# Altium PCB Setback.PcbDoc
Units mil, origin at the board's own origin, x right, y up, seen from the top; angles counter-clockwise.
Board outline 2244.09 x 944.88 mil, 2 copper layers (Top Layer, Bottom Layer), stack 65.792 mil thick; 6 components, 5 nets, 18 pads, 0 vias.
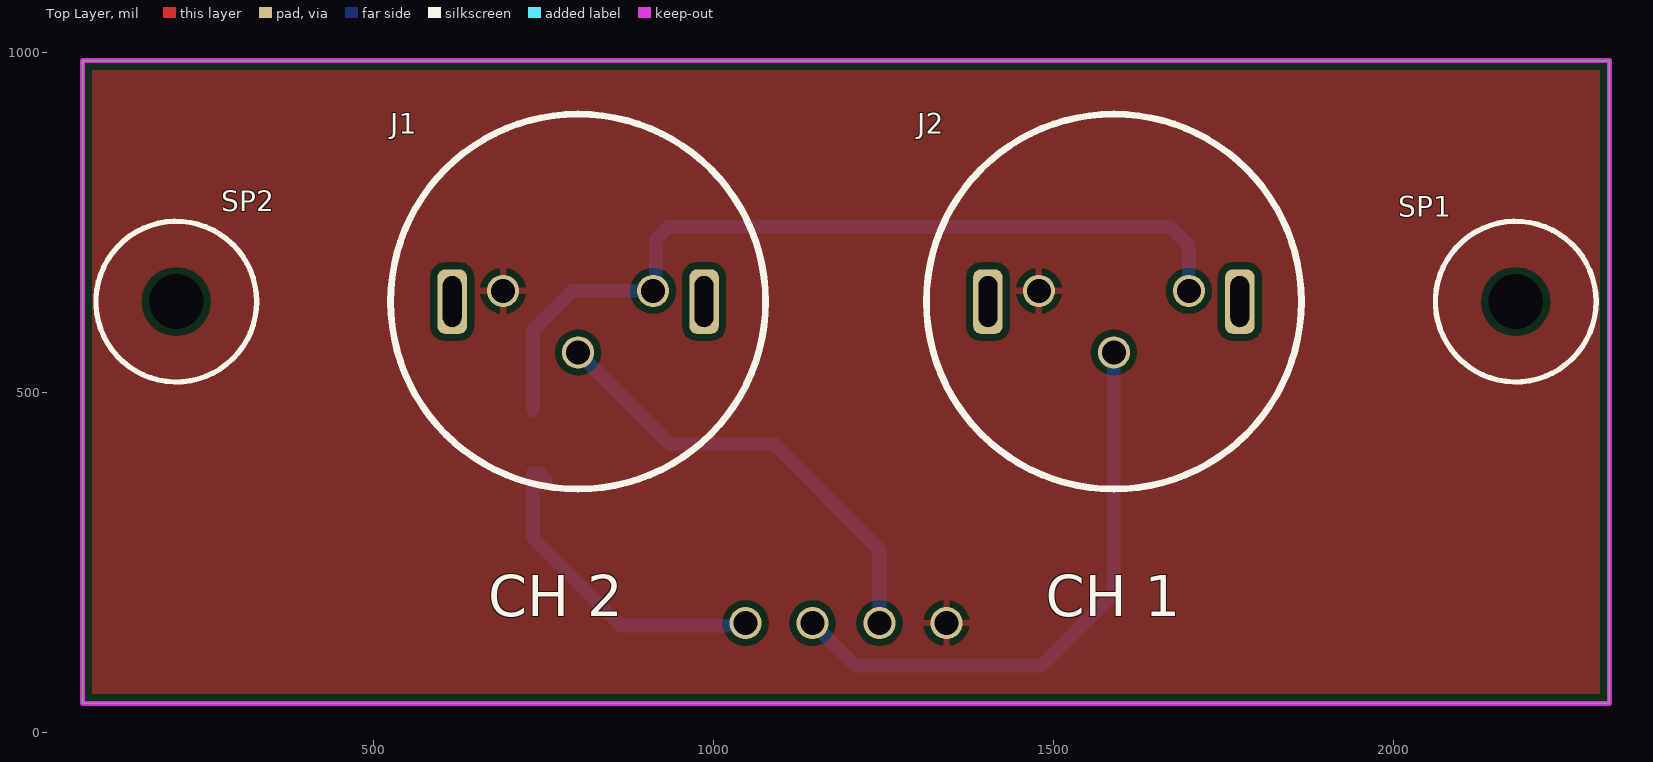
[diagram p0: Top Layer view]
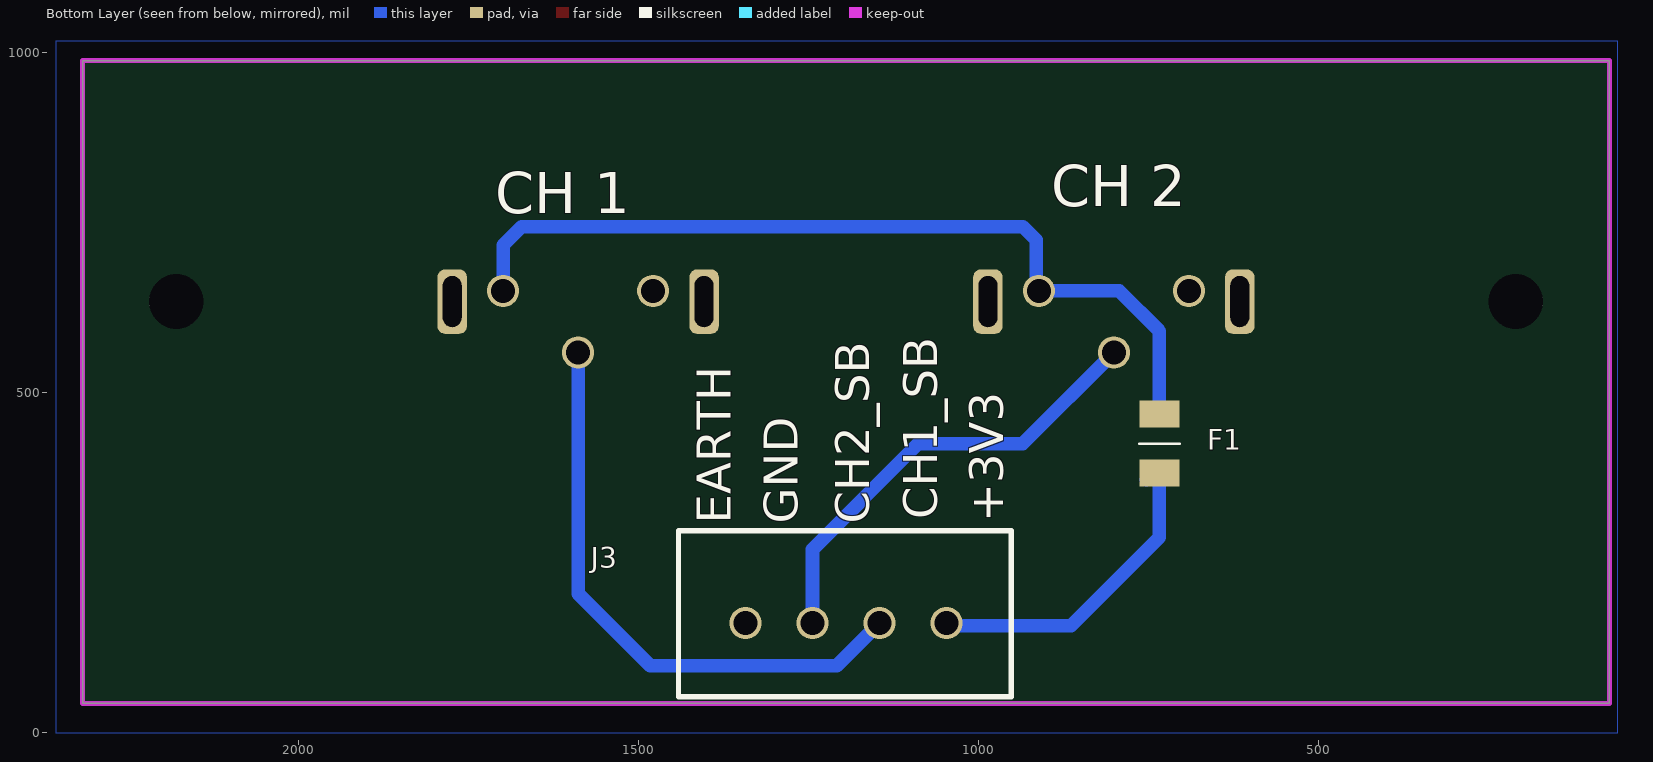
[diagram p1: Bottom Layer view, seen from below]

## Layer stack, top to bottom
Top Solder: solder mask 0.4, Solder Resist, Dk 3.5
Top Layer: signal copper 1.4
Dielectric 1: dielectric 62.9921, FR-4, Dk 4.8
Bottom Layer: signal copper 1.4
Bottom Solder: solder mask 0.4, Solder Resist, Dk 3.5

## Board outline
72.83,43.31 72.83,988.19 2316.93,988.19 2316.93,43.31

## Design rules (kind name [scope] priority, off if disabled: settings)
Clearance [All] p1: gap=10 ignorepadtopadclearanceinfootprint=FALSE except(0: Arc-Hole Track-Hole SMDPad-Hole THPad-Hole Via-Hole Fill-Hole Poly-Hole Region-Hole Text-Hole)
HoleSize [All] p1: absolutevalues=TRUE maxlimit=157.48 minlimit=1 maxpercent=80.000 minpercent=20.000
PolygonConnect [All] p1: connectstyle=Relief reliefconductorwidth=10 reliefentries=4 polygonreliefangle="90 Angle" airgapwidth=10
RoomDefinition Setback [InComponentClass('Setback')] p1: confinementstyle=ConfineIn formatcopy=TRUE lockcomponents=FALSE outline 0,1059.06 0,0 2358.27,0 2358.27,1059.06
RoutingVias [All] p1: holewidth=28 width=50 viastyle="Through Hole" minholewidth=28 minwidth=50 maxholewidth=28 maxwidth=50
SolderMaskExpansion [All] p1: expansion=4 istentingtop=FALSE
Width [All] p1: maxlimit=40 minlimit=10 preferedwidth=20
29 further rules are at their usual default settings.

## Components (designator, comment, footprint, x,y, rotation, side; value= is the part's Value field where it differs from the comment)
F1 "SMD0805-050" SMD0805-050 734.25,425.2 r270 bottom
J1 "DIN-MINI-3-Pin" MIN-DIN-3-PIN-SOCKET 801.18,633.86 r180 top
J2 "DIN-MINI-3-Pin" MIN-DIN-3-PIN-SOCKET 1588.58,633.86 r180 top
J3 "JST XH Connector, 4-Pin" jst-b4b-xh-ax 1194.88,161.42 r0 bottom
SP1 "6MM Spacer" "Spacer-2mm dia x 6mm" 2179.13,633.86 r0 top
SP2 "6MM Spacer" "Spacer-2mm dia x 6mm" 210.63,633.86 r0 top

## Footprints (in the part's own frame and the unit in brackets; to place one, negate y for a bottom-side part, rotate by r counter-clockwise, add the part's x,y. Pads: shape width x height; smd on the part's side, far side on the other; paste and mask are expansions set on the pad)
jst-b4b-xh-ax [mm] "JST 4-pin connector PCB mount"
  round 1.2 hole 0.9: 1(-3.75,0) 2(-1.25,0) 3(1.25,0) 4(3.75,0)
  silkscreen extent -6.17,-3.45 6.25,2.75, body extent -6.2,-3.38 6.2,2.72, height 7
MIN-DIN-3-PIN-SOCKET [mm]
  round 1.2 hole 0.9 paste+0.152 mask+0.148: 1(2.8,-0.4) 2(-2.8,-0.4) 3(0,1.9)
  rrect50% 1.1x2.4 hole 0.7 slot 1.9 at 90 deg paste+0.152 mask+0.148: SH(-4.7,0) SH(4.7,0)
  silkscreen extent -7,-7 7,7, body extent -8,-8 8,8, height 8.5
SMD0805-050 [mm]
  rect 1x1.5 smd: 1(-1.1,0) 2(1.1,0)
  silkscreen extent 0,-0.75 0,0.75, body extent -1.05,-0.68 1.05,0.68, height 0.61
"Spacer-2mm dia x 6mm" [mm]
  round 2 hole 2.05: 0(0,0)
  silkscreen extent -3,-3 3,3, body extent -3,-3 3,3, height 6

## Part data
F1: "PTC Resetable Fuse 0805 0.5A hold", LCSC=C66452
J3: library part JST-B4B-XH-A, Digikey=455-2249-ND, Farnell PN=1516278, LatestRevisionDate=17-Jul-2002, LatestRevisionNote="Re-released for DXP Platform.", Publisher="Altium Limited"
SP1 SP2: library part Spacer-6mm

## Nets (pads, with @x,y where several pads share a name; then routed paths per layer and width w, separated by ;. In a path a pad name is that pad's centre, name@x,y a point inside that pad or via, vN(x,y) a via of type N, cw(c..) or ccw(c..) an arc to the next point about the centre after c; other vN are vias at no path point)
+3.3V: F1.1 J1.2 J2.2 | length 1264.2
  Bottom Layer w20: F1.1@734.25,474.41 734.25,590.55 793.31,649.61 J1.2 915.35,653.54 915.35,724.41 935.04,744.09 1671.26,744.09 1698.82,716.54 J2.2
CH1_SB: J2.3 J3.2 | length 867.4
  Bottom Layer w20: J3.2 1208.66,98.43 1482.28,98.43 1588.58,204.72 J2.3
CH2_SB: J1.3 J3.3 | length 675
  Bottom Layer w20: J1.3@805.12,559.06 J1.3 935.04,425.2 1088.58,425.2 1244.09,269.69 J3.3
GND: J1.1 J2.1 J3.4
NetF1_2: F1.2 J3.1 | length 486.5
  Bottom Layer w20: F1.2@753.78,372.2 744.09,381.89 F1.2 734.25,287.4 864.17,157.48 1043.31,157.48 J3.1
pads on no net: J1.SH J2.SH SP1.0 SP2.0

## Polygon pours and split planes (outlines as drawn)
no net on Bottom Layer "NONET_L02_P000" (solid, remove dead copper, pour order 0): 61.02,1016.18 2356.3,1016.18 2356.3,0 61.02,0
GND on Top Layer "GND_L01_P001" (solid, remove dead copper, pour order 1): 37.4,1007.87 2368.11,1007.87 2368.11,12.97 37.4,12.97

## Keep-outs
Keep-Out Layer:
  the board outline again, w7.87

## Silkscreen, mask and mechanical layers (free items; w line width, h text height)
Top Overlay:
  text "CH 2" at 669.45,171.42 h60
  text "CH 1" at 1488.35,171.42 h60
Bottom Overlay:
  text "CH 2" at 893.54,773.78 h60
  text "CH 1" at 1710.63,763.78 h60
  text "CH1_SB" at 1061.05,313.99 h50 r270
  text "+3V3" at 963.7,309.92 h50 r270
  text "CH2_SB" at 1161.05,307.33 h50 r270
  text "GND" at 1265.75,307.09 h50 r270
  text "EARTH" at 1364.17,307.09 h50 r270